# Altium PCB PCB1.PcbDoc
Units mil, origin at the board's own origin, x right, y up, seen from the top; angles counter-clockwise.
Board outline 1250 x 3060.29 mil, 4 copper layers (Top Signal, Top GND, Bottom GND, Bottom Layer), stack 23.756 mil thick; 23 components, 18 nets, 166 pads, 17 vias.
Unrouted connection lines stored in the file: 11.
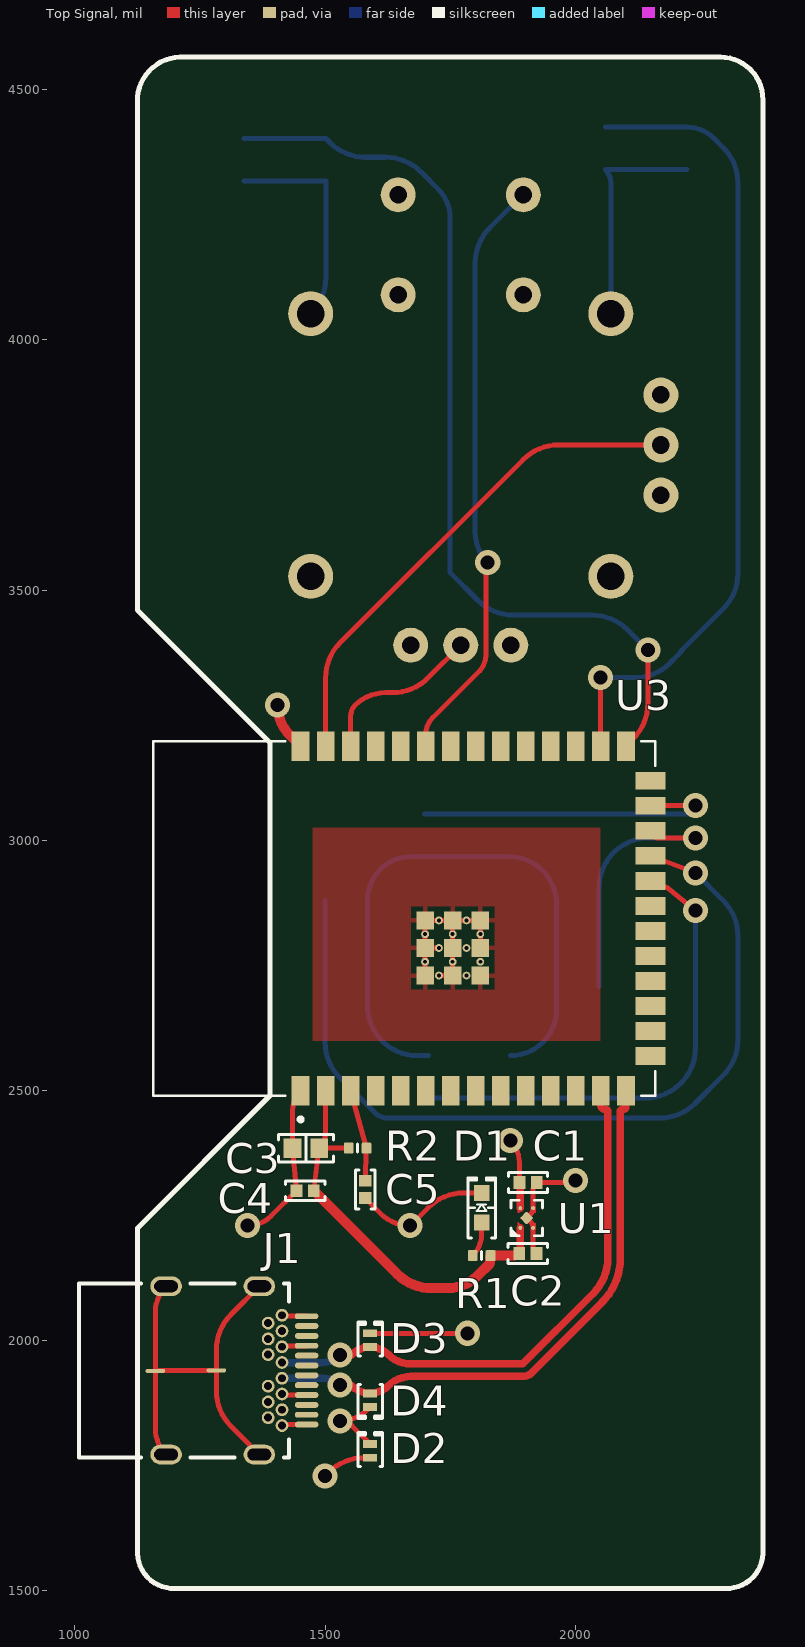
[diagram p0: Top Signal view]
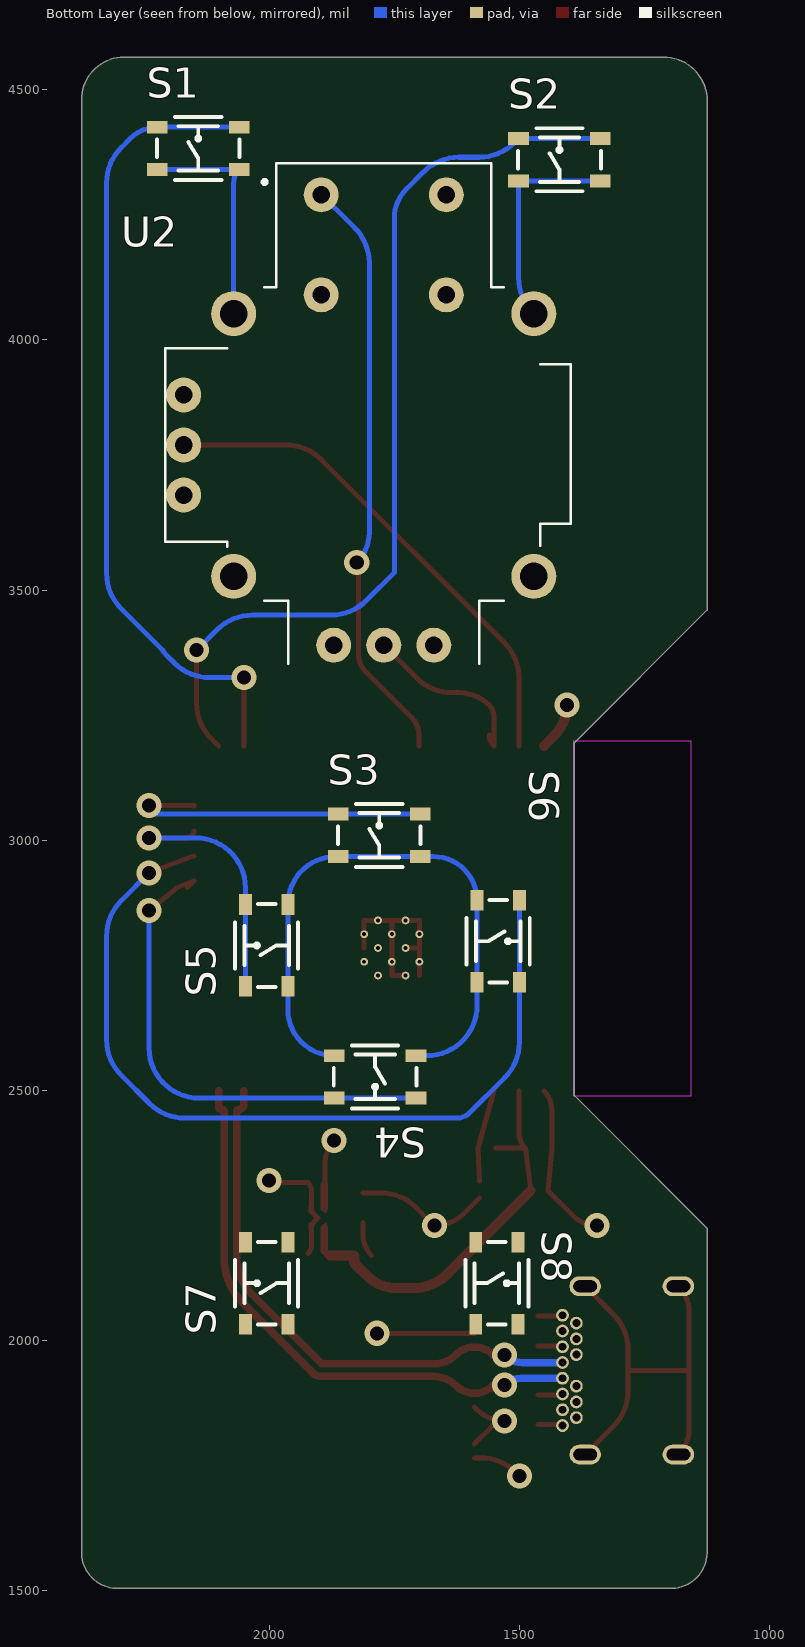
[diagram p1: Bottom Layer view, seen from below]
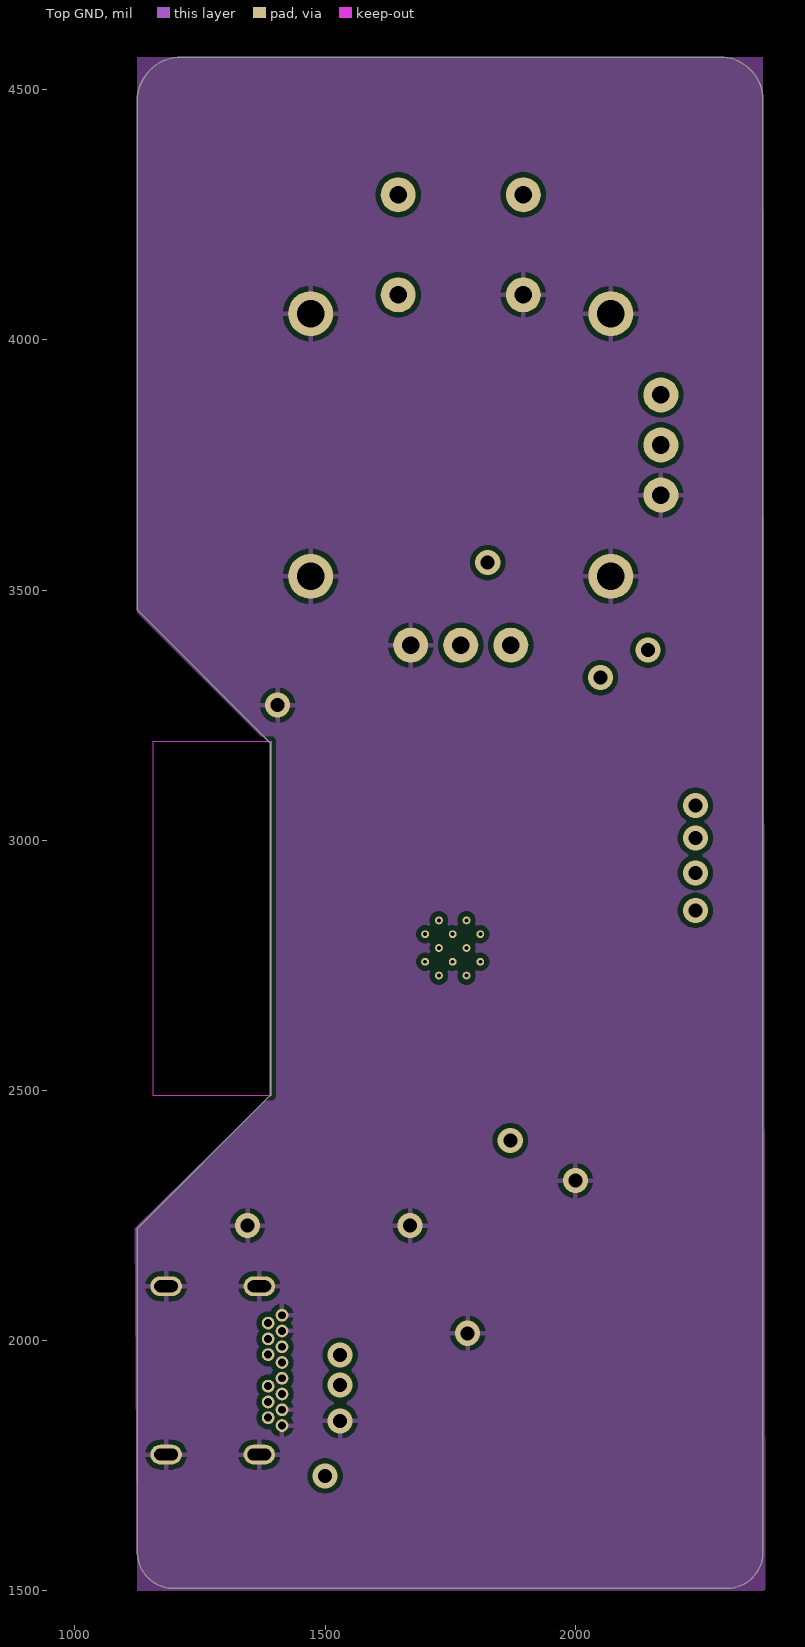
[diagram p2: Top GND]
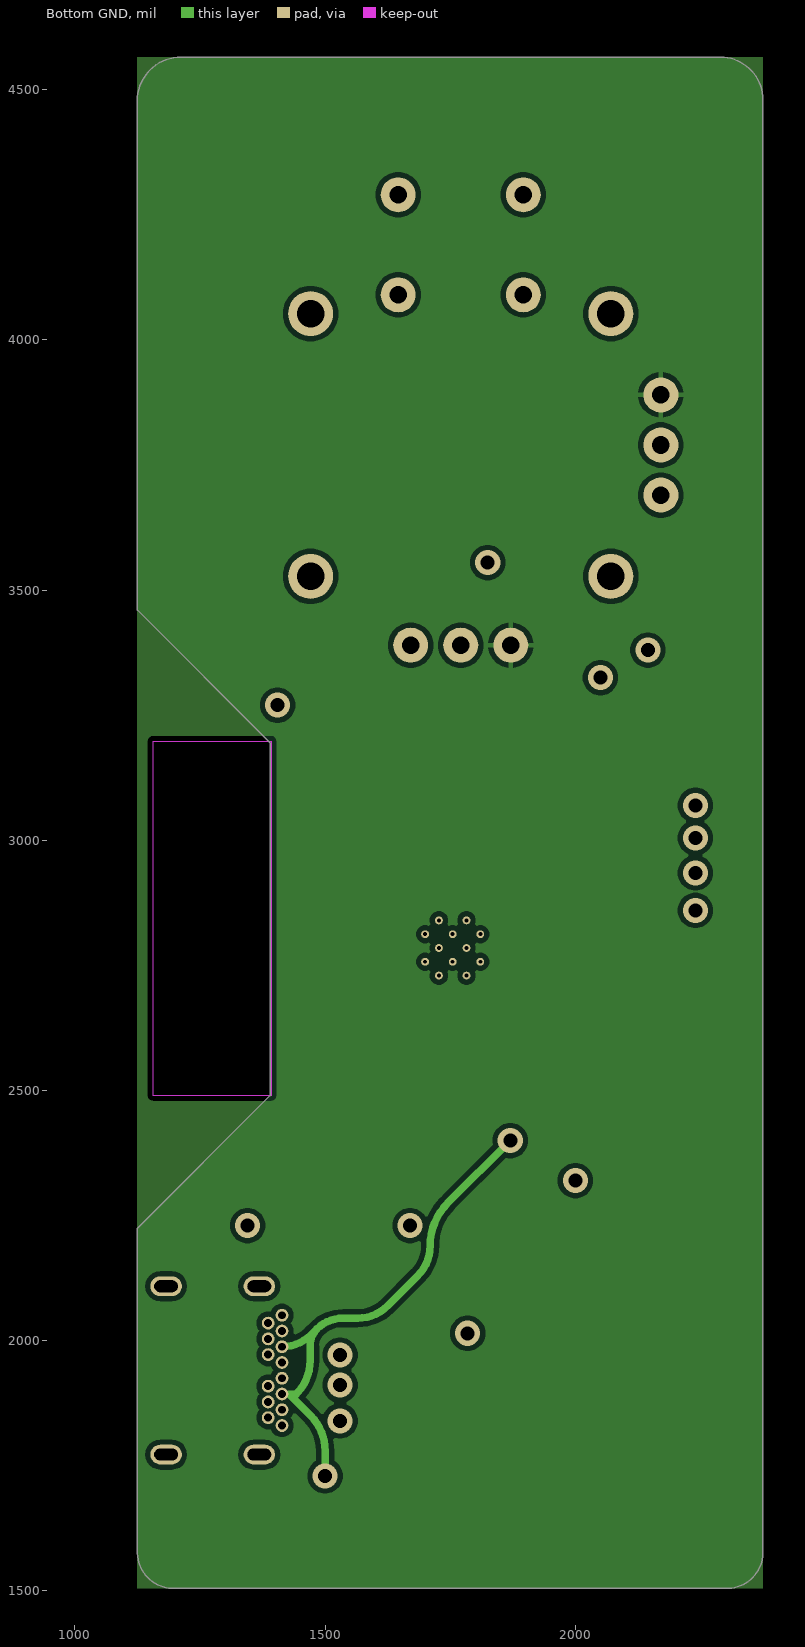
[diagram p3: Bottom GND]
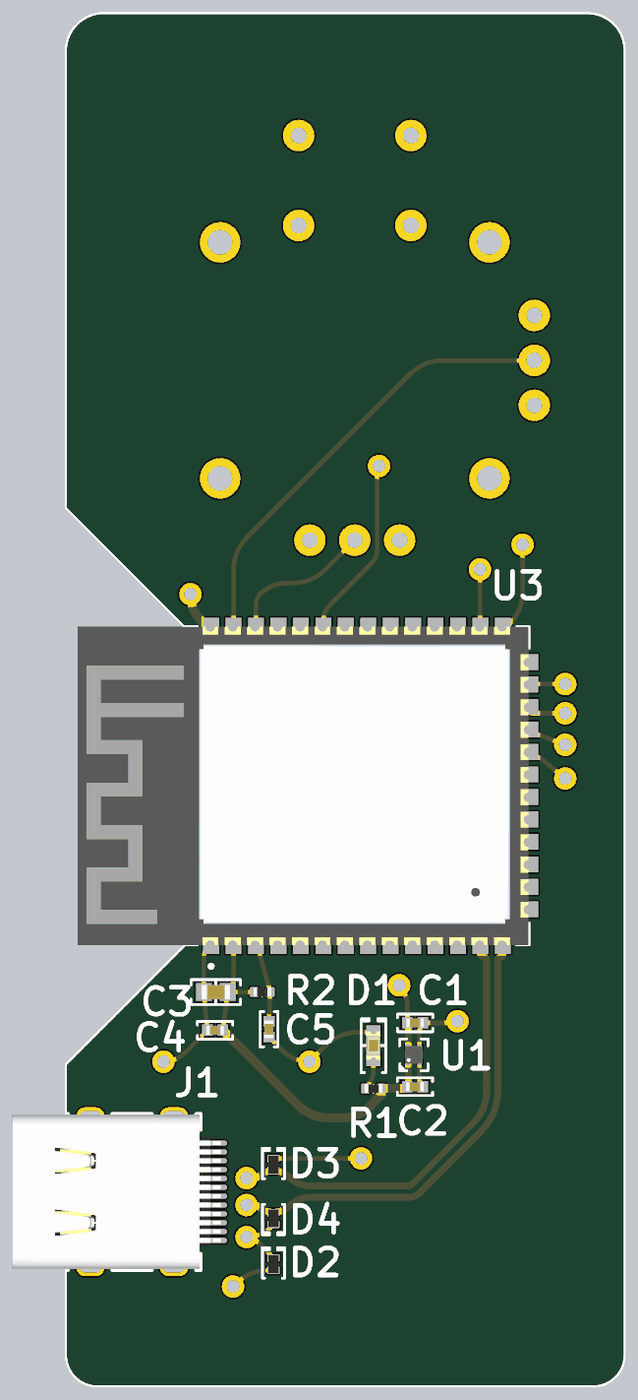
[diagram p4: 3D render of the assembled board from above, using the file's embedded part models]
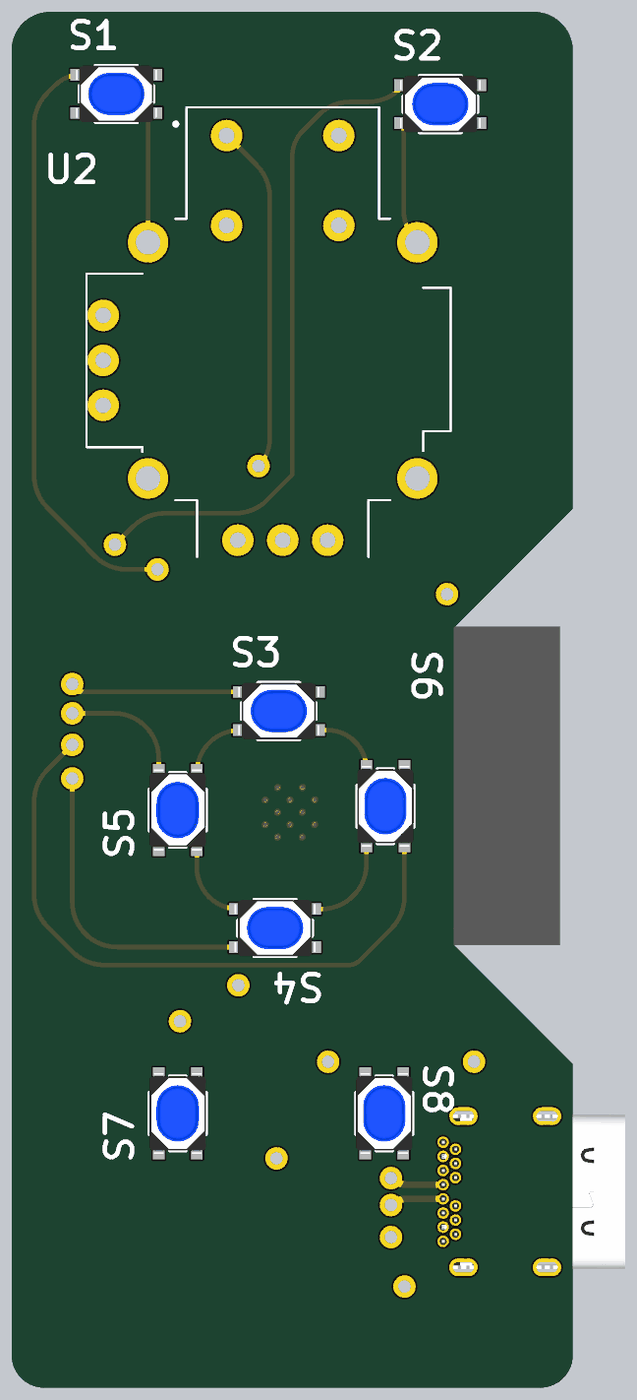
[diagram p5: 3D render of the assembled board from below, using the file's embedded part models]

## Layer stack, top to bottom
Top Solder: solder mask 0.4, Solder Resist, Dk 3.5
Top Signal: signal copper 1.4
Dielectric 2: prepreg 2.8, PP-006, Dk 4.1
Top GND: signal copper 1.378
Dielectric 1: dielectric 12.6, FR-4, Dk 4.8
Bottom GND: signal copper 1.378
Dielectric 3: prepreg 2.8, PP-006, Dk 4.1
Bottom Layer: signal copper 1.4
Bottom Solder: solder mask 0.4, Solder Resist, Dk 3.5

## Board outline
1200,1505 cw(c1197.5,1577.5) 1125,1575 1125,2225 1390,2490 1390,3195 1125,3460 1125,4485 cw(c1212.5,4477.5) 1220,4565 2215,4565 2290,4565 cw(c2290,4480) 2375,4480 2375,1575 cw(c2302.5,1577.5) 2300,1505

## Design rules (kind name [scope] priority, off if disabled: settings)
Clearance [All] p1: gap=10 ignorepadtopadclearanceinfootprint=FALSE except(0: Arc-Hole Track-Hole SMDPad-Hole THPad-Hole Via-Hole Fill-Hole Poly-Hole Region-Hole Text-Hole)
DiffPairsRouting [All] p1: maxlimit=10 minlimit=10 mostfreqgap=10 toplayer_minwidth=15 toplayer_maxwidth=15 toplayer_prefwidth=15 midlayer1_minwidth=15 midlayer1_maxwidth=15 midlayer1_prefwidth=15 midlayer2_minwidth=15 midlayer2_maxwidth=15 midlayer2_prefwidth=15 bottomlayer_minwidth=15 bottomlayer_maxwidth=15 bottomlayer_prefwidth=15 maxuncoupledlength=500
PolygonConnect [All] p1: connectstyle=Relief reliefconductorwidth=10 reliefentries=4 polygonreliefangle="90 Angle" airgapwidth=10
RoutingVias [All] p1: holewidth=28 width=50 viastyle="Through Hole" minholewidth=28 minwidth=50 maxholewidth=28 maxwidth=50
SolderMaskExpansion [All] p1: expansion=4 istentingtop=FALSE
Width [All] p1: maxlimit=10 minlimit=10 preferedwidth=10
29 further rules are at their usual default settings.

## Classes and differential pairs
differential pair class USB: USB_D
differential pair USB_D: +USB_D_P -USB_D_N

## Components (designator, comment, footprint, x,y, rotation, side; value= is the part's Value field where it differs from the comment)
C1 "CL05Y105KP6VPNC" "CAP 0402_1005" 1905.47,2316.35 r180 top value=1µF
C2 "CL05Y105KP6VPNC" "CAP 0402_1005" 1905.12,2174.28 r180 top value=1µF
C3 "GRM188C80J106MEA6J" "CAP 0603_1608" 1461.57,2385 r0 top value=10µF
C4 "CL05Y105KP6VPNC" "CAP 0402_1005" 1460,2300 r0 top value=1µF
C5 "CL05Y105KP6VPNC" "CAP 0402_1005" 1580,2302.32 r90 top value=1µF
D1 "RED" "LED 0603_1608 RED" 1812.8,2265.79 r90 top value=Red
D2 "ESD" 0402 1590,1780 r90 top
D3 "ESD" 0402 1590,2001.22 r90 top
D4 "ESD" 0402 1590,1881.22 r270 top
J1 "632723300011" "WURTH 632723300011" 1240.54,1940.79 r270 top
R1 "9D1KR2J" RESC0402(1005)_L 1812.8,2170.32 r0 top value=9.1k
R2 "9D1KR2J" RESC0402(1005)_L 1565,2385 r180 top value=9.1k
S1 "BUMPER_TOP" "C&K PTS810" 2141.69,4382.68 r180 bottom
S2 "BUMPER_BOTTOM" "C&K PTS810" 1420,4360 r180 bottom
S3 "DPAD_UP" "C&K PTS810" 1780,3010 r180 bottom
S4 "DPAD_DOWN" "C&K PTS810" 1788.31,2527.32 r0 bottom
S5 "DPAD_LEFT" "C&K PTS810" 2005,2790 r90 bottom
S6 "DPAD_RIGHT" "C&K PTS810" 1542.32,2798.31 r270 bottom
S7 "START" "C&K PTS810" 2005,2115 r90 bottom
S8 "SELECT" "C&K PTS810" 1545,2115 r270 bottom
U1 "LP5907SNX-3.3" TI-DQN4-480X480TP_V 1902.8,2245.32 r90 top
U2 "COM-09032" XDCR_COM-09032 1771.06,3790 r180 bottom
U3 "ESP32-S3-WROOM-1-N16R2" XCVR_ESP32-S3-WROOM-1-N16R2 1658.15,2843.94 r90 top

## Footprints (in the part's own frame and the unit in brackets; to place one, negate y for a bottom-side part, rotate by r counter-clockwise, add the part's x,y. Pads: shape width x height; smd on the part's side, far side on the other; paste and mask are expansions set on the pad)
0402 [mm] "SODFL, 2-Leads, Body 0.675x1.075mm, IPC Medium Density"
  rect 0.4x0.7 smd: 1(-0.35,0) 2(0.35,0)
  silkscreen extent -0.8,-0.63 0.92,0.63, body extent -0.51,-0.31 0.5,0.3, height 0.45
"C&K PTS810" [mm] "T-Switch, 4-leads, body 4.2x3.2mm, C&K PTS810 SJM 250 SMTR LFS"
  rect 1.05x0.65 smd mask+0.1: 1(-2.075,1.075) 2(2.075,1.075) 3(-2.075,-1.075) 4(2.075,-1.075)
  silkscreen extent -2.1,-1.6 2.1,1.6, body extent -2.29,-1.6 2.29,1.6, height 2.7
"CAP 0402_1005" [mm] "Chip Capacitor, 2-Leads, Body 1.02x0.51mm, IPC Medium Density"
  rect 0.6x0.64 smd: 1(-0.44,0) 2(0.44,0)
  silkscreen extent -1,-0.5 1,0.5, body extent -0.5,-0.26 0.5,0.26, height 0.52
"CAP 0603_1608" [mm] "Chip Capacitor, 2-Leads, Body 1.60x0.80mm, IPC Medium Density"
  rect 0.9x1 smd: 1(-0.675,0) 2(0.675,0)
  silkscreen extent -1.4,-0.7 1.4,0.7, body extent -0.8,-0.41 0.8,0.41, height 0.82
"LED 0603_1608 RED" [mm] "Chip Diode, 2-Leads, Body 1.60x0.80mm, IPC Medium Density"
  rect 0.8x0.8 smd: 1(-0.75,0) 2(0.75,0)
  silkscreen extent -1.52,-0.7 1.52,0.7, body extent -0.8,-0.4 0.8,0.4, height 0.53
RESC0402(1005)_L [mm] "Chip Resistor, Body 1.0x0.5mm, IPC High Density"
  rrect25% 0.5x0.55 smd: 1(-0.45,0) 2(0.45,0)
  silkscreen extent 0,-0.2 0,0.2, body extent -0.5,-0.25 0.5,0.25, height 0.3
TI-DQN4-480X480TP_V [mm] "SON, 4-Leads, Body 1x1mm, Pitch 0.65mm, Thermal Pad 0.5x0.5mm"
  round 0.2 smd mask+0: 1(-0.5,0.325) 2(-0.5,-0.325) 3(0.5,-0.325) 4(0.5,0.325)
  rrect25% 0.48x0.48 smd rot 45 paste+0.005: 5(0,0)
  Top Signal region: -0.225,0.45 -0.225,0.425 -0.425,0.225 -0.6,0.225 -0.625,0.25 -0.625,0.425 -0.6,0.45
  Top Signal region: 0.275,0.45 0.275,0.375 0.425,0.225 0.6,0.225 0.625,0.25 0.625,0.425 0.6,0.45
  Top Signal region: 0.275,-0.45 0.275,-0.375 0.425,-0.225 0.6,-0.225 0.625,-0.25 0.625,-0.425 0.6,-0.45
  Top Signal region: -0.275,-0.45 -0.275,-0.375 -0.425,-0.225 -0.6,-0.225 -0.625,-0.25 -0.625,-0.425 -0.6,-0.45
  silkscreen extent -0.9,-0.8 0.9,0.8, body extent -0.5,-0.5 0.5,0.5, height 0.35
"WURTH 632723300011" [mm]
  oval 0.3x1.2 smd: A1(-2.75,5.65) A2(-2.25,5.65) A3(-1.75,5.65) A4(-1.25,5.65) A5(-0.75,5.65) A6(-0.25,5.65) A7(0.25,5.65) A8(0.75,5.65) A9(1.25,5.65) A10(1.75,5.65) A11(2.25,5.65) A12(2.75,5.65)
  round 0.65 hole 0.4: B1(2.8,4.4) B2(2.4,3.7) B3(1.6,3.7) B4(1.2,4.4) B5(0.8,3.7) B6(0.4,4.4) B7(-0.4,4.4) B8(-0.8,3.7) B9(-1.2,4.4) B10(-1.6,3.7) B11(-2.4,3.7) B12(-2.8,4.4) S(-2,4.4) S(2,4.4)
  oval 1x1.6 hole 1.2 slot 0.6 at 0 deg: S(-4.27,3.25) S(-4.27,-1.48) S(4.27,3.25) S(4.27,-1.48)
  oval 0.2x1 smd: S(0,1.07) S(0.025,-2.03)
  silkscreen extent -4.4,-5.9 4.43,4.75, body extent -4.37,-5.89 4.37,5.9, height 3.06
XCVR_ESP32-S3-WROOM-1-N16R2 [mm]
  rect 1.5x0.9 smd: 1(-8.75,5.26) 2(-8.75,3.99) 3(-8.75,2.72) 4(-8.75,1.45) 5(-8.75,0.18) 6(-8.75,-1.09) 7(-8.75,-2.36) 8(-8.75,-3.63) 9(-8.75,-4.9) 10(-8.75,-6.17) 11(-8.75,-7.44) 12(-8.75,-8.71) 13(-8.75,-9.98) 14(-8.75,-11.25) 27(8.75,-11.25) 28(8.75,-9.98) 29(8.75,-8.71) 30(8.75,-7.44) 31(8.75,-6.17) 32(8.75,-4.9) 33(8.75,-3.63) 34(8.75,-2.36) 35(8.75,-1.09) 36(8.75,0.18) 37(8.75,1.45) 38(8.75,2.72) 39(8.75,3.99) 40(8.75,5.26)
  rect 0.9x1.5 smd: 15(-6.985,-12.5) 16(-5.715,-12.5) 17(-4.445,-12.5) 18(-3.175,-12.5) 19(-1.905,-12.5) 20(-0.635,-12.5) 21(0.635,-12.5) 22(1.905,-12.5) 23(3.175,-12.5) 24(4.445,-12.5) 25(5.715,-12.5) 26(6.985,-12.5)
  rect 0.9x0.9 smd: 41_1(-1.5,-2.46) 41_2(-2.9,-2.46) 41_3(-0.1,-2.46) 41_4(-2.9,-3.86) 41_5(-1.5,-3.86) 41_6(-0.1,-3.86) 41_7(-2.9,-1.06) 41_8(-1.5,-1.06) 41_9(-0.1,-1.06)
  round 0.4 hole 0.2 mask+0: 41_10(-1.5,-1.76) 41_11(-2.9,-1.76) 41_12(-0.1,-1.76) 41_13(-2.9,-3.16) 41_14(-1.5,-3.16) 41_15(-0.1,-3.16) 41_16(-2.2,-1.06) 41_17(-0.8,-1.06) 41_18(-2.2,-2.46) 41_19(-0.8,-2.46) 41_20(-2.2,-3.86) 41_21(-0.8,-3.86)
  Keep-Out Layer region: 9,6.75 -9,6.75 -9,12.75 9,12.75
  Keep-Out Layer region: 9,6.75 -9,6.75 -9,12.75 9,12.75
  silkscreen extent -10.3,-12.75 9,12.75, body extent -9.02,-12.7 8.98,12.8, height 3.25
XDCR_COM-09032 [mil]
  round 70 hole 35.43: B1A(-125,500) B1B(125,500) B2A(-125,300) B2B(125,300)
  round 70 hole 35: H1(-100,-400) H2(0,-400) H3(100,-400) V1(-400,100) V2(-400,0) V3(-400,-100)
  round 90 hole 55: S1(-300,262.5) S2(-300,-262.5) S3(300,-262.5) S4(300,262.5)
  silkscreen extent -437,-437 374,563

## Part data
C1 C2 C4 C5: library part CMP-001-29091-1, "CAP CER 1UF 10V X7S 0402", Case/Package="0402 (1005 Metric)", manufacturer="Samsung Electro-Mechanics", Operating Temperature="-55°C ~ 125°C", Ratings=AEC-Q200, Temperature Coefficient=X7S, Tolerance=10%, Applications=Automotive, ComponentLink1Description=Datasheet, ComponentLink1URL=http://www.samsungsem.com/kr/support/product-search/mlcc/__icsFiles/afieldfile/2018/06/26/CL05Y105KP6VPNC.pdf, ComponentLink2Description="DigiKey Link", ComponentLink2URL=https://www.digikey.com/en/products/detail/samsung-electro-mechanics/CL05Y105KP6VPNC/11487815, Device Package="0402 (1005 Metric)", lastupdated="2023-09-28 7:03:54 PM", Lifecycle Status=Active, Minimum Order=1, Mounting Type="Surface Mount, MLCC", packaging=CutTape, Part Number=CL05Y105KP6VPNC, Part Status=Active, partid=40006, price=0.03, series=CL
C3: library part CMP-001-39906-1, "CAP CER 10UF 6.3V X6S 0603", Case/Package="0603 (1608 Metric)", manufacturer="Murata Electronics", Operating Temperature="-55°C ~ 105°C", Temperature Coefficient=X6S, Tolerance=20%, Voltage - Rated=6.3V, Applications="General Purpose", ComponentLink1Description="DigiKey Link", ComponentLink1URL=https://www.digikey.com/en/products/detail/murata-electronics/GRM188C80J106MEA6J/10704296, Device Package="0603 (1608 Metric)", lastupdated="2023-09-28 7:07:22 PM", Lifecycle Status=Active, Minimum Order=1, Mounting Type="Surface Mount, MLCC", packaging=TapeAndReel, Part Number=GRM188C80J106MEA6J, Part Status=Active, partid=55208, price=0.01, series=GRM, Size / Dimension="0.063\" L x 0.032\" W (1.60mm x 0.80mm)", Thickness (Max)="0.037\" (0.95mm)"
D1: library part CMP-004-14433-1, "LED RED CLEAR 2SMD", Case/Package="0603 (1608 Metric)", Color=Red, Current - Test=20mA, Lens Color=Colorless, manufacturer="Everlight Electronics Co Ltd", Millicandela Rating=79mcd, Part Number=EAST16084RA0, Supplier Device Package=2-SMD, Voltage - Forward (Vf) (Typ)=2V, ComponentLink1Description=Datasheet, ComponentLink1URL=https://everlightamericas.com/index.php?controller=attachment&id_attachment=918, ComponentLink2Description="DigiKey Link", ComponentLink2URL=https://www.digikey.com/en/products/detail/everlight-electronics-co-ltd/EAST16084RA0/5142354, Configuration=Standard, Device Package="0603 (1608 Metric)", Height (Max)=0.50mm, lastupdated="2023-09-28 8:20:24 PM", Lens Size="1.00mm x 0.80mm", Lens Style="Rectangle with Flat Top", Lens Transparency=Clear, Lifecycle Status=Active, Minimum Order=1, Mounting Type="Surface Mount", packaging=TapeAndReel, Part Status=Active, partid=941, price=0.03, series=-, Size / Dimension="1.60mm L x 0.80mm W", Viewing Angle=120°, Wavelength - Dominant=624nm, Wavelength - Peak=632nm
D2 D3 D4: library part CMP-004-08678-1, "TVS DIODE 5V 8.2V 2X2DFN", Capacitance @ Frequency="21pF @ 1MHz (Max)", Case/Package="0402 (1006 Metric)", Current - Peak Pulse (10/1000µs)=8A, manufacturer="ON Semiconductor", Operating Temperature="-55°C ~ 150°C (TJ)", Part Number=ESDM3051N2T5G, Power Line Protection=No, Supplier Device Package="2-X2DFN (1x0.6)", Voltage - Breakdown (Min)=5.1V, Voltage - Clamping (Max) @ Ipp=8.2V, Voltage - Reverse Standoff (Typ)="5V (Max)", Applications=USB, Bidirectional Channels=1, ComponentLink1Description=Datasheet, ComponentLink1URL=https://www.onsemi.com/pub/Collateral/ESDM3051-D.PDF, ComponentLink2Description="DigiKey Link", ComponentLink2URL=http://digikey.com/product-detail/en/on-semiconductor/ESDM3051N2T5G/ESDM3051N2T5GOSCT-ND/8024483, Device Package="0402 (1006 Metric)", lastupdated="2023-09-28 8:41:31 PM", Lifecycle Status=Active, Minimum Order=1, Mounting Type="Surface Mount", packaging=TapeAndReel, Part Status=Active, partid=10501, price=0.04, series=-, type=Zener
J1: library part CMP-002-00380-1, "CONN RCP USB3.1 TYPEC 24P SMD RA", Current Rating (Amps)=5A, manufacturer="Würth Elektronik", Operating Temperature="-40°C ~ 105°C", Voltage - Rated=20VDC, ComponentLink1Description=Datasheet, ComponentLink1URL=https://katalog.we-online.de/em/datasheet/632723x00011.pdf, ComponentLink2Description="DigiKey Link", ComponentLink2URL=http://digikey.com/product-detail/en/w-rth-elektronik/632723300011/732-9618-1-ND/5806673, Connector Type="USB - C (Type - C)", Gender=Receptacle, lastupdated="2020-05-24 10:36:40 PM", Lifecycle Status=Active, Mating Cycles=10000, Minimum Order=1, Mounting Feature=Horizontal, Mounting Type="Surface Mount, Right Angle; Through Hole", Number of Contacts=24, Number of Ports=1, packaging=TapeAndReel, Part Number=632723300011, Part Status=Active, price=2.95, series=WR-COM, Shielding=Unshielded, Specifications="USB 3.1 (USB 3.1 Gen 2, Superspeed+)", Termination=Solder
R1 R2: library part CMP-009-00114-3, "9K1 0.063W 5% 0402 (1005 Metric)  SMD", Case/Package=0402, Power=63mW, Tolerance=5%, Mounting Technology=SMT, Pins=2
S1 S2 S3 S4 S5 S6 S7 S8: library part CMP-011-00060-1, "SWITCH TACTILE SPST-NO 0.05A 16V", Contact Rating @ Voltage="0.05A @ 16VDC", manufacturer=C&K, Operating Force=160gf, Operating Temperature="-40°C ~ 85°C", Part Number="PTS810 SJM 250 SMTR LFS", Actuator Height off PCB, Vertical=2.50mm, Actuator Orientation="Top Actuated", Actuator Type="Oval Button", Circuit=SPST-NO, ComponentLink1Description=Datasheet, ComponentLink1URL=https://dznh3ojzb2azq.cloudfront.net/products/Tactile/PTS810/documents/datasheet.pdf, ComponentLink2Description="DigiKey Link", ComponentLink2URL=http://digikey.com/product-detail/en/c-k/PTS810-SJM-250-SMTR-LFS/CKN10502CT-ND/4176673, Illumination=Non-Illuminated, lastupdated="2020-04-09 10:00:13 AM", Lifecycle Status=Active, Minimum Order=1, Mounting Type="Surface Mount", Outline="4.20mm x 3.20mm", packaging=TapeAndReel, Part Status=Active, price=0.16, series=PTS810, Switch Function=Off-Mom, Termination Style="J Lead"
U1: library part CMP-019-00040-3, "Ultra-Low-Noise, Low-IQ LDO, 3.3 V, 0.25 A, -40 to 125 degC, 4-Pin X2SON, RoHS, Tape and Reel", Max Operating Temperature=125°C, Min Operating Temperature=-40°C, Output Voltage=3.3V, Pins=5
U2: "Thumb Joystick", Package=None, Availability=Unavailable, MP=COM-09032, price=None
U3: library part CMP-319-000000-2, "Bluetooth, WiFi 802.11b/g/n, Bluetooth v5.0 Transceiver Module 2.4GHz PCB Trace Surface Mount", Package=None, Availability="In Stock", Check_prices=https://www.snapeda.com/parts/ESP32-S3-WROOM-1-N16R2/Espressif+Systems/view-part/?ref=eda, Component Type=Standard, Design Item ID=ESP32-S3-WROOM-1-N16R2, MF="Espressif Systems", MP=ESP32-S3-WROOM-1-N16R2, Pin Count=49, price=None, Purchase-URL=https://pricing.snapeda.com/search/part/ESP32-S3-WROOM-1-N16R2/?ref=eda, SnapEDA_Link=https://www.snapeda.com/parts/ESP32-S3-WROOM-1-N16R2/Espressif+Systems/view-part/?ref=snap, Source=ESP32-S3-WROOM-1-N16R2.SchLib

## Via types
v1: diameter 50, hole 28, Top Signal to Bottom Layer, 17 vias

## Nets (pads, with @x,y where several pads share a name; then routed paths per layer and width w, separated by ;. In a path a pad name is that pad's centre, name@x,y a point inside that pad or via, vN(x,y) a via of type N, cw(c..) or ccw(c..) an arc to the next point about the centre after c; other vN are vias at no path point)
BUMPER_BOTTOM: S2.1 S2.2 U3.27 | length 1849.7
  Top Signal w10: U3.27 2115.71,3203.07 ccw(c2045,3273.78) 2145,3273.78 v1(2145,3380)
  Bottom Layer w10: S2.2 S2.1 1509.73,4394.29 ccw(c1580.44,4465) 1580.44,4365 1620.78,4365 cw(c1620.78,4265) 1691.49,4335.71 1726.1,4301.1 cw(c1668.4,4243.4) 1738.38,4285.37 cw(c1668.4,4243.4) 1750,4243.4 1750,3535 1805.71,3479.29 ccw(c1876.42,3550) 1876.42,3450 2033.58,3450 cw(c2033.58,3350) 2104.29,3420.71 v1(2145,3380)
BUMPER_TOP: S1.1 S1.2 U3.28 | length 1622.5
  Top Signal w10: v1(2050,3325) 2050,3190.99 ccw(c2053.63,3190.99) U3.28
  Bottom Layer w10: v1(2050,3325) 2118.58,3325 ccw(c2118.58,3425) 2189.29,3354.29 2205,3370 ccw(c2160.61,3414.39) 2213.67,3380.84 2295.71,3462.88 ccw(c2225,3533.59) 2325,3533.59 2325,4313.58 ccw(c2225,4313.58) 2295.71,4384.29 2277.35,4402.65 ccw(c2223.39,4348.68) 2223.58,4425 ccw(c2223.39,4348.68) S1.1 S1.2
BUTTON_DOWN: S4.1 S4.2 U3.22 | length 991.9
  Top Signal w10: U3.22@2162.99,2906.22 U3.22 2185,2905 v1(2240,2860)
  Bottom Layer w10: S4.1 S4.2 2140,2485 ccw(c2140,2585) 2240,2585 v1(2240,2860)
BUTTON_LEFT: S5.1 S5.2 U3.24 | length 544.1
  Top Signal w10: U3.24 ccw(c2164.21,3018.94) 2164.21,3005 v1(2240,3005)
  Bottom Layer w10: S5.1 S5.2 2047.32,2905 cw(c2147.32,2905) 2147.32,3005 v1(2240,3005)
BUTTON_RIGHT: S6.1 S6.2 U3.23 | length 1730.7
  Top Signal w10: U3.23 v1(2240,2935)
  Bottom Layer w10: S6.1 S6.2 1500,2596.42 ccw(c1600,2596.42) 1529.29,2525.71 1600,2455 ccw(c1624.14,2479.14) 1624.14,2445 2168.58,2445 ccw(c2168.58,2545) 2239.29,2474.29 2295.71,2530.71 ccw(c2225,2601.42) 2325,2601.42 2325,2808.58 ccw(c2225,2808.58) 2295.71,2879.29 v1(2240,2935)
BUTTON_UP: S3.1 S3.2 U3.25 | length 642.1
  Top Signal w10: U3.25 cw(c2151.34,3068.94) 2151.34,3070 v1(2240,3070)
  Bottom Layer w10: S3.2 S3.1 2222.32,3052.32 ccw(c2222.32,3070) v1(2240,3070)
CHIP_PU: C5.2 R2.1 U3.3 | length 184.2
  Top Signal w10: U3.3 R2.1 C5.2
CLICK_X: U2.B1A U3.35 | length 1155.3
  Top Signal w10: U3.35 1701.06,3211.35 cw(c1748.65,3211.35) 1715,3245 1808.17,3338.18 ; 1808.17,3338.18 ccw(c1777.06,3369.29) 1821.06,3369.29 1821.06,3551.06 v1(1825,3555)
  Bottom Layer w10: v1(1825,3555) cw(c1885.36,3615.36) v1(1825,3555) cw(c1885.36,3615.36) 1800,3615.36 1800,4153.58 cw(c1900,4153.58) 1829.29,4224.29 1870,4265
JOY_GND: C1.1 C2.1 C3.1 C4.1 C5.1 D1.2 D2.2 D3.2 D4.2 J1.A1 J1.A12 J1.B1 J1.B12 J1.S S1.3 S1.4 S2.3 S2.4 S3.3 S3.4 S4.3 S4.4 S5.3 S5.4 S6.3 S6.4 S7.3 S7.4 S8.3 S8.4 U1.2 U1.3 U1.5 U2.B2A U2.H3 U2.S1 U2.S2 U2.S3 U2.S4 U2.V3 U3.1 U3.40 U3.41_1 U3.41_2 U3.41_3 U3.41_4 U3.41_5 U3.41_6 U3.41_7 U3.41_8 U3.41_9 | length 4801.6
  Top Signal w10: J1.S@1182.27,1772.68 cw(c1234.55,1824.95) 1160.62,1824.95 J1.S@1160.62,1939.8 ; J1.S@1182.27,2108.9 ccw(c1234.55,2056.62) 1160.62,2056.62 J1.S@1160.62,1939.8 ; v1(1345,2230) ccw(c1345,2296.82) 1392.25,2249.57 C4.1 C3.1 1435,2460.67 cw(c1489.84,2460.67) U3.1 ; J1.S@1368.49,1772.68 1311.96,1829.21 cw(c1382.67,1899.93) 1282.67,1899.93 J1.S@1282.67,1940.79 ; J1.S@1368.49,2108.9 1311.96,2052.36 ccw(c1382.67,1981.65) 1282.67,1981.65 J1.S@1282.67,1940.79 ; J1.B1 cw(c1418.52,1825.8) 1418.52,1832.52 J1.A12 ; J1.B12 ccw(c1418.52,2055.78) 1418.52,2049.06 J1.A1 ; C5.1 1610.25,2254.75 ccw(c1670,2314.5) v1(1670,2230) 1706.03,2266.03 cw(c1776.74,2195.32) 1776.74,2295.32 D1.2 ; D2.2 1553.52,1830.26 ccw(c1530,1806.73) v1(1530,1840) ccw(c1530,1918.6) 1585.58,1863.02 D4.2 ; D3.2 v1(1785,2015) ; U3.41_7 U3.41_8 ; 1727.44,2729.76 U3.41_2 U3.41_3 ; 1727.44,2784.88 U3.41_8 ; U3.41_5 U3.41_6 U3.41_3 ; C2.1 cw(c1938.98,2190.82) 1915.59,2190.82 U1.2 ccw(c1898.96,2225.63) 1910.72,2237.39 U1.5 1910.72,2253.24 ccw(c1898.96,2265) U1.3 1915.59,2298.96 cw(c1940.19,2298.96) C1.1 1996.35,2316.35 v1(2000,2320) ; J1.S@1160.62,1939.8 cw(c1163,1937.43) 1163,1940.79 J1.S@1282.67,1940.79 ; U3.41_8 U3.41_9 U3.41_3
  Top Signal w20: v1(1405,3270) ccw(c1490.73,3270) 1430.11,3209.38 U3.40
  Bottom Layer w10: S2.4 S2.3 1501.69,4124.55 cw(c1401.69,4124.55) 1472.4,4053.84 U2.S4 ; S4.3 1684.65,2569.65 cw(c1684.65,2669.65) 1584.65,2669.65 S6.4 S6.3 cw(c1672.32,2880) 1672.32,2967.68 S3.4 S3.3 1866.69,2967.68 cw(c1866.69,2871.69) S5.4 S5.3 1962.68,2662.32 cw(c1870,2662.32) S4.4 ; U2.S1 2071.06,4313.65 ccw(c2033.29,4313.65) S1.4 S1.3
JOY_VCC: C2.2 C3.2 C4.2 R1.2 R2.2 U1.1 U2.H1 U2.V1 U3.2 | length 834.7
  Top Signal w10: C4.2 C3.2 ; U3.2 1501.06,2416.18 cw(c1456.97,2416.18) C3.2 ; R2.2 C3.2 ; R1.2@1830,2169.08 cw(c1831.75,2169.08) R1.2 ; C2.2@1878.22,2170.32 ccw(c1878.22,2183.86) C2.2 ccw(c1882.47,2179.6) C2.2@1890,2179.6
  Top Signal w15: C2.2@1890,2179.6 U1.1
  Top Signal w20: C4.2 1643.03,2134.29 ccw(c1713.74,2205) 1713.74,2105 1745,2105 ccw(c1745,2189.5) 1804.75,2129.75 1830,2155 R1.2@1830,2169.08 ; R1.2 C2.2@1878.22,2170.32
JOY_X: U2.H2 U3.38 | length 360.7
  Top Signal w10: U3.38@1560,3210 cw(c1529.49,3210) U3.38 1551.06,3248.42 cw(c1581.58,3248.42) 1560,3270 cw(c1620.36,3209.64) 1620.36,3295 1634.64,3295 ccw(c1634.64,3395) 1705.35,3324.29 U2.H2
JOY_Y: U2.V2 U3.39 | length 1014.6
  Top Signal w10: U3.39 1501.06,3324.64 cw(c1601.06,3324.64) 1530.35,3395.35 1895.71,3760.71 cw(c1966.42,3690) 1966.42,3790 U2.V2
NetD1_1: D1.1 R1.1 | length 70.7
  Top Signal w10: R1.1 ccw(c1752.31,2213.09) 1812.8,2213.09 D1.1
SELECT: S8.1 S8.2 U3.11
START: S7.1 S7.2 U3.10
USB_D_N: D3.1 J1.B7 U3.13 | length 1119
  Top Signal w15: v1(1530,1971.22) 1550.84,1971.22 ccw(c1550.84,1975.23) 1553.67,1972.39 cw(c1590,1936.07) D3.1 cw(c1590,1936.07) 1626.33,1972.39 ccw(c1671.41,2017.48) 1671.41,1953.72 1895,1953.72 2035.71,2094.43 ccw(c1965,2165.14) 2065,2165.14 2065,2460 ccw(c2059.15,2454.15) 2059.15,2462.42 cw(c2059.15,2470.51) 2051.06,2470.51 U3.13
  Bottom Layer w15: J1.B7 1494.55,1956.54 ccw(c1494.55,2006.67) v1(1530,1971.22)
USB_D_P: D4.1 J1.B6 U3.14 | length 1156.4
  Top Signal w15: v1(1530,1911.22) 1550.84,1911.22 cw(c1550.84,1907.21) 1553.67,1910.05 ccw(c1590,1946.37) D4.1 ccw(c1590,1946.37) 1626.33,1910.05 cw(c1671.41,1864.96) 1671.41,1928.72 1895,1928.72 ccw(c1895,1953.72) 1912.68,1936.04 2053.39,2076.75 ccw(c1965,2165.14) 2090,2165.14 2090,2460 cw(c2095.85,2454.15) 2095.85,2462.42 ccw(c2095.85,2467.64) 2101.06,2467.64 U3.14
  Bottom Layer w15: J1.B6 1496.64,1925.04 cw(c1496.64,1877.86) v1(1530,1911.22)
VBUS: C1.2 D2.1 J1.A4 J1.A9 J1.B4 J1.B9 U1.4 | length 1342.8
  Top Signal w10: J1.B4 ccw(c1418.52,1898.3) 1418.52,1891.57 J1.A9 ; J1.B9 cw(c1418.52,1983.28) 1418.52,1990 J1.A4 ; v1(1500,1730) 1506.93,1736.93 cw(c1577.64,1666.22) 1577.64,1766.22 D2.1 ; v1(1870,2400) cw(c1826.18,2356.18) 1888.15,2356.18 C1.2 cw(c1883.68,2311.88) C1.2@1890,2311.88
  Top Signal w15: U1.4 C1.2@1890,2311.88
  Bottom GND w10: 1442.2,1893.54 1445.13,1896.47 ; 1445.14,1896.48 1445.3,1896.64
  Bottom GND w15: J1.B9 ccw(c1413.77,2070.75) 1472.26,2012.26 1483.79,2023.79 ; 1442.2,1893.54 1427.99,1893.54 1470.71,1850.82 cw(c1400,1780.11) 1500,1780.11 v1(1500,1730) ; 1445.3,1896.64 ccw(c1375.57,1960.32) 1470,1960.32 ; 1470,1960.36 1470,1990.5 cw(c1517.07,1990.5) 1483.79,2023.79 ; v1(1870,2400) 1745.39,2275.39 ccw(c1830.71,2190) 1710,2190 cw(c1625.5,2190) 1685.25,2130.25 1624.75,2069.75 cw(c1565,2129.5) 1565,2045 1535,2045 ccw(c1535,1972.57) 1483.79,2023.79
pads on no net: J1.A2 J1.A3 J1.A5 J1.A6 J1.A7 J1.A8 J1.A10 J1.A11 J1.B2 J1.B3 J1.B5 J1.B8 J1.B10 J1.B11 U2.B1B U2.B2B U3.4 U3.5 U3.6 U3.7 U3.8 U3.9 U3.12 U3.15 U3.16 U3.17 U3.18 U3.19 U3.20 U3.21 U3.26 U3.29 U3.30 U3.31 U3.32 U3.33 U3.34 U3.36 U3.37 U3.41_10 U3.41_11 U3.41_12 U3.41_13 U3.41_14 U3.41_15 U3.41_16 U3.41_17 U3.41_18 U3.41_19 U3.41_20 U3.41_21

## Polygon pours and split planes (outlines as drawn)
JOY_GND on Top Signal "GND" (solid, pour order 1): 1475,3025 2050,3025 2050,2600 1475,2600
JOY_VCC on Bottom GND "GND" (solid, pour order 5): 2375,4565 1125,4565 1125,1505 2375,1505
JOY_GND on Top GND "GND" (solid, remove dead copper, pour order 6): 1125,4565 1125,3455 1385,3195 1390,2490 1120,2225 1125,1500 2380,1500 2375,4565 2380,1500 2375,4565

## Silkscreen, mask and mechanical layers (free items; w line width, h text height)
Top Overlay:
  lines w10: 1125,1575 ccw(c1197.5,1577.5) 1200,1505 2300,1505 ccw(c2302.5,1577.5) 2375,1575 2375,4480 ccw(c2290,4480) 2290,4565 2215,4565 1220,4565 ccw(c1212.5,4477.5) 1125,4485 1125,4380 1125,4137.5 1125,3702.5 1125,3460 1390,3195 1390,2490 1125,2225 1125,1575

## Text inside footprints (layer, text, board x,y; h text height)
U3: Mechanical 13 "ANTENNA" at 1284.13,2666.77 h50 r90